# EAGLE board MAPLE-CUN-V023 (EAGLE 7.3.0)

No outline drawn. Coordinates in mm, seen from the top.
Copper layers (1*16): Top 0.035mm / dielectric 1.5mm / Bottom 0.035mm
Design rules "SeeedStudio_2layer_DRU_no_angle_20140221": minimum track width 6mil, minimum drill 12mil, track to track 6mil, track to pad 6mil, pad to pad 6mil, via to via 6mil, smd to smd 0mil, copper to edge 10mil, drill to drill 10mil, minimum pad ring 10mil, minimum via ring 6mil, stop-mask expansion 2mil, vias tented up to drill 100mil, thermal gap 10mil
Net classes: 0 default: width 0.406 mm; 1 PWR: width 0.305 mm
Holes 2 mm at 48.9,9.53

## Footprints (pad centres in the part's own frame; a part is rotated, then mirrored left to right if it is on the bottom)
C1206K = smd 1.5 x 2: 1 -1.5,0; 2 1.5,0
C1210 = smd 1.6 x 2.7: 1 -1.4,0; 2 1.4,0
C0805 = smd 1.3 x 1.5: 1 -0.95,0; 2 0.95,0
MA04-1 = drill 1.016 long: 1 -3.81,0; 2 -1.27,0; 3 1.27,0; 4 3.81,0
SMD1,27-2,54 = smd 1.27 x 2.54: 1 0,0
0204/7 = drill 0.813 octagon: 1 -3.81,0; 2 3.81,0
R0805W = smd 1.5 x 1: 1 -1.052,0; 2 1.052,0
SJ = smd 1.168 x 1.6: 1 -0.762,0; 2 0.762,0
20-DIP = drill 1.016 pad 1.27 long: 1 -24.13,-7.62; 2 -21.59,-7.62; 3 -19.05,-7.62; 4 -16.51,-7.62; 5 -13.97,-7.62; 6 -11.43,-7.62; 7 -8.89,-7.62; 8 -6.35,-7.62; 9 -3.81,-7.62; 10 -1.27,-7.62; 11 1.27,-7.62; 12 3.81,-7.62; 13 6.35,-7.62; 14 8.89,-7.62; 15 11.43,-7.62; 16 13.97,-7.62; 17 16.51,-7.62; 18 19.05,-7.62; 19 21.59,-7.62; 20 24.13,-7.62 | drill 1 pad 1.27 long: 21 24.13,7.62; 22 21.59,7.62; 23 19.05,7.62; 24 16.51,7.62; 25 13.97,7.62; 26 11.43,7.62; 27 8.89,7.62; 28 6.35,7.62; 29 3.81,7.62; 30 1.27,7.62; 31 -1.27,7.62; 32 -3.81,7.62; 33 -6.35,7.62; 34 -8.89,7.62; 35 -11.43,7.62; 36 -13.97,7.62; 37 -16.51,7.62; 38 -19.05,7.62; 39 -21.59,7.62; 40 -24.13,7.62

## Placement (x,y rotation side)
C2  4,7uF  [C1206K]  37.47,19.37 0 top
C5  10uF  [C1210]  36.83,46.99 0 top
C6  22pF  [C0805]  41.91,50.8 270 top
DBG  [MA04-1]  26.99,40.96 270 top
GND  [SMD1,27-2,54]  13.34,-10.79 0 top
IR+  [SMD1,27-2,54]  20.95,-9.84 0 top
IR-IN  [SMD1,27-2,54]  20.95,-4.76 0 top
PC+  [SMD1,27-2,54]  17.14,-10.16 0 top
PC+1  [SMD1,27-2,54]  17.14,-5.08 0 top
PC-  [SMD1,27-2,54]  24.77,-9.84 0 top
PC-1  [SMD1,27-2,54]  24.77,-4.76 0 top
PWR+  [SMD1,27-2,54]  16.19,1.59 0 top
PWR+1  [SMD1,27-2,54]  40.32,0.64 0 top
PWR-  [SMD1,27-2,54]  13.34,-5.4 0 top
PWR-1  [SMD1,27-2,54]  44.13,0.95 0 top
R1  220  [0204/7]  39.37,26.67 90 top
R2  100  [0204/7]  39.69,37.47 90 top
R3  100  [R0805W]  34.92,37.15 90 top
R4  220  [R0805W]  38.73,26.99 90 top
R5  220  [0204/7]  35.88,26.99 90 top
R7  220  [R0805W]  35.88,26.99 90 top
SJ1  [SJ]  39.69,37.47 90 top
U$1  MAPLEMINI  [20-DIP]  38.1,30.8 270 top
UART0  [MA04-1]  26.99,51.12 270 top

## Library data of the parts
C2 C5 C6 R1-R5 R7 = rcl
DBG UART0 = con-lstb; OC_FARNELL: unknown; OC_NEWARK: unknown
GND IR+ IR-IN PC+ PC+1 PC- PC-1 PWR+ PWR+1 PWR- PWR-1 = wirepad
SJ1 = jumper
U$1 = maplemini-small

## Nets
1-PB10: R1.1 R4.1 R5.1 R7.1
3-PB0: IR-IN.1
+5V: U$1.21
CC_CS0: U$1.29
CC_CS1: U$1.35
CC_CS2: U$1.4
CC_CS3: U$1.25
CC_IN_0: U$1.33
CC_IN_1: U$1.7
CC_IN_2: U$1.5
CC_IN_3: U$1.37
CC_OUT_0: U$1.32
CC_OUT_1: U$1.6
CC_OUT_2: U$1.36
GND: C2.2 C5.2 C6.2 DBG.4 GND.1 U$1.24 U$1.39 UART0.4
IR+: C2.1 IR+.1 R2.1 R3.1 SJ1.1
MISO1: U$1.27
MISO2: U$1.18
MOSI1: U$1.26
NRESET: U$1.34
PWR+: PC+.1 PWR+.1 R5.2 R7.2
PWR-: PC-.1 PWR-.1
RES+: PC+1.1 PWR+1.1 R1.2 R4.2
RES-: PC-1.1 PWR-1.1
RST: U$1.17
RX0: U$1.30 UART0.3
RX1: U$1.22
RX_DBG: DBG.3 U$1.14
SCK1: U$1.28
SCK2: U$1.19
SWCLK/TCK: U$1.10
SWDIO/TMS: U$1.11
SWO/TDO: U$1.8
TDI: U$1.9
TX0: U$1.31 UART0.2
TX1: U$1.23
TX_DBG: DBG.2 U$1.15
VCC: C5.1 C6.1 DBG.1 R2.2 R3.2 SJ1.2 U$1.40 UART0.1
WIZ_CS: U$1.20
WIZ_RST: U$1.16

## Tracks (layer width: path | path; a pad name or v marks a point on that pad's centre or on a via)
1-PB10  (3 unrouted)
GND  (7 unrouted)
IR+  (4 unrouted)
PWR+  (3 unrouted)
PWR-  (1 unrouted)
RES+  (3 unrouted)
RES-  (1 unrouted)
RX0  (1 unrouted)
RX_DBG  (1 unrouted)
TX0  (1 unrouted)
TX_DBG  (1 unrouted)
VCC  (7 unrouted)

## Text on the board
tNames: LAN | VCC | AV+ | RST | GND | USB | SCK | CS | MOSI | MISO | VCC | VCC | TX | TX | RX | RX | NSS | GND | GND | GND | MO | 5V | LAN | GND | RST | SCK | MISO | 31 (PB12) | VIN
bNames: VCC | AV+ | 31 (PB12) | VIN